# EAGLE board Term Project _ Micromouse (EAGLE 7.6.0)

Size 73.58 x 190.39 mm. Coordinates in mm from the lower left corner, seen from the top.
Outline: 0,0 56.82,0 56.82,53.33 0,53.33 0,0
Copper layers (1*16): Top 0.035mm / dielectric 1.5mm / Bottom 0.035mm
Design rules "default": minimum track width 10mil, minimum drill 24mil, track to track 8mil, track to pad 8mil, pad to pad 8mil, via to via 8mil, smd to smd 8mil, copper to edge 40mil, drill to drill 8mil, minimum pad ring 10mil, minimum via ring 8mil, stop-mask expansion 4mil, vias tented up to drill 0mil, thermal gap 10mil

## Footprints (pad centres in the part's own frame; a part is rotated, then mirrored left to right if it is on the bottom)
DC-POWER = drill 0.889 pad 2.54 octagon: + 0,2.54; - 0,-2.54
LED5MM = drill 0.813 octagon: A -1.27,0; K 1.27,0
2P-2.54-65/35MIL = drill 0.889 pad 1.651 square: 1 0,1.27 | drill 0.889 pad 1.651: 2 0,-1.27
PIEZO-22MM = drill 1 pad 2.54: P$1 -5,0; P$2 5,0
1X3P-2.54-2.54-11.6-3.0-BLACK-MALE = drill 0.889 pad 1.651 square: 1 0,2.54 | drill 0.889 pad 1.651: 2 0,0; 3 0,-2.54
0207/10 = drill 0.813 octagon: 1 -5.08,0; 2 5.08,0
TL1105 = drill 1 pad 1.676: 1 -2.25,3.25; 2 2.25,3.25; 3 -2.25,-3.25; 4 2.25,-3.25
ARDUINO_UNO = drill 1.016 pad 1.88: 0 63.5,50.8; 1 60.96,50.8; 2 58.42,50.8; 3 55.88,50.8; 3.3V 35.56,2.54; 4 53.34,50.8; 5 50.8,50.8; 5V 38.1,2.54; 6 48.26,50.8; 7 45.72,50.8; 8 41.656,50.8; 9 39.116,50.8; 10 36.576,50.8; 11 34.036,50.8; 12 31.496,50.8; 13 28.956,50.8; A0 50.8,2.54; A1 53.34,2.54; A2 55.88,2.54; A3 58.42,2.54; A4 60.96,2.54; A5 63.5,2.54; AREF 23.876,50.8; GND 26.416,50.8; GND. 43.18,2.54; GND.. 40.64,2.54; I/OREF 30.48,2.54; N/C 27.94,2.54; RESET 33.02,2.54; SCL 18.796,50.8; SDA 21.336,50.8; VIN 45.72,2.54 | hole 3.2: 66.04,7.62; 66.04,35.56; 15.24,50.8; 13.97,2.54
1X16P-2.54-2.54-11.6-3.0-BLACK-MALE = drill 0.889 pad 1.651 square: 1 0,19.05 | drill 0.889 pad 1.651: 2 0,16.51; 3 0,13.97; 4 0,11.43; 5 0,8.89; 6 0,6.35; 7 0,3.81; 8 0,1.27; 9 0,-1.27; 10 0,-3.81; 11 0,-6.35; 12 0,-8.89; 13 0,-11.43; 14 0,-13.97; 15 0,-16.51; 16 0,-19.05
DIL16 = drill 0.813 long: 1 -8.89,-3.81; 2 -6.35,-3.81; 3 -3.81,-3.81; 4 -1.27,-3.81; 5 1.27,-3.81; 6 3.81,-3.81; 7 6.35,-3.81; 8 8.89,-3.81; 9 8.89,3.81; 10 6.35,3.81; 11 3.81,3.81; 12 1.27,3.81; 13 -1.27,3.81; 14 -3.81,3.81; 15 -6.35,3.81; 16 -8.89,3.81

## Placement (x,y rotation side)
BAT2  [DC-POWER]  5,48.18 0 top
D1  [LED5MM]  5,149.78 0 top
D2  [LED5MM]  5,162.48 0 top
D3  [LED5MM]  5,175.18 0 top
M1  [2P-2.54-65/35MIL]  5,73.58 0 top
M2  [2P-2.54-65/35MIL]  5,86.28 0 top
PIEZO1  [PIEZO-22MM]  5,238.68 0 top  (outside the outline)
PING1  [1X3P-2.54-2.54-11.6-3.0-BLACK-MALE]  5,22.78 0 top
PING2  [1X3P-2.54-2.54-11.6-3.0-BLACK-MALE]  5,111.68 0 top
PING3  [1X3P-2.54-2.54-11.6-3.0-BLACK-MALE]  5,124.38 0 top
R1  1k‎Ω  [0207/10]  5,187.88 0 top
R2  1k‎Ω  [0207/10]  5,200.58 0 top  (outside the outline)
R3  1k‎Ω  [0207/10]  5,213.28 0 top  (outside the outline)
R4  1k‎Ω  [0207/10]  5,225.98 0 top  (outside the outline)
R5  1k‎Ω  [0207/10]  5,276.78 0 top  (outside the outline)
S1  [TL1105]  5,98.98 0 top
S2  [TL1105]  5,264.08 0 top  (outside the outline)
U1  [ARDUINO_UNO]  5,10.08 0 top
U2  [1X16P-2.54-2.54-11.6-3.0-BLACK-MALE]  5,251.38 0 top  (outside the outline)
U3  [1X16P-2.54-2.54-11.6-3.0-BLACK-MALE]  5,35.48 0 top
U4  [DIL16]  5,60.88 0 top
U6  [ARDUINO_UNO]  5,137.08 0 top

## Library data of the parts
BAT2 D1-D3 M1 M2 PIEZO1 PING1-PING3 R1-R5 S1 S2 U1-U4 U6 = AUTODESK_CIRCUITS_BREADBOARD

## Nets
N$1: U1.11 U4.15
N$2: M2.1 U4.14
N$3: S1.2
N$4: S1.4 U1.2
N$5: S1.3
N$6: U1.8 U4.1
N$7: U1.5 U4.2
N$8: M1.1 U4.3
N$9: M1.2 U4.6
N$10: U1.9 U4.7
N$11: U1.12 U4.9
N$12: U1.10 U4.10
N$13: M2.2 U4.11
N$14: BAT2.- PIEZO1.P$2 PING1.1 PING2.1 PING3.1 S1.1 U1.GND U3.1 U3.3 U3.5 U3.16 U4.5 U4.12
N$15: U4.13
N$16: PING3.3 U1.3
N$17: PING2.3 U1.4
N$18: D1.A R3.1
N$19: D2.A R2.1
N$20: D1.K D2.K D3.K U6.GND
N$21: D3.A R1.1
N$22: R1.2 U6.11
N$23: R2.2 U6.12
N$24: R3.2 U6.13
N$25: U1.A0 U3.4
N$26: U1.A1 U3.6
N$27: U1.A2 U3.11
N$28: U1.A3 U3.12
N$29: U1.A4 U3.13
N$30: U1.A5 U3.14
N$31: PING1.2 PING2.2 PING3.2 R4.2 U1.5V U3.2
N$32: U3.9
N$33: U3.10
N$34: R4.1 U3.15
N$35: U3.7
N$36: U3.8
N$37: PING1.3 U1.7
N$38: BAT2.+ U4.8 U4.16
N$39: U4.4
N$40: PIEZO1.P$1 U1.6
N$41: U1.GND.. U6.GND..
N$42: U1.1 U6.0
N$43: U1.0 U6.1
N$44: U2.4 U6.10
N$45: U2.6 U6.9
N$46: U2.7
N$47: U2.8
N$48: U2.9
N$49: U2.10
N$50: U2.11 U6.8
N$51: U2.12 U6.7
N$52: U2.13 U6.6
N$53: U2.14 U6.5
N$54: R5.1 U2.15
N$55: S2.1 U2.1 U2.3 U2.5 U2.16 U6.GND.
N$56: S2.4 U6.2
N$57: S2.2
N$58: S2.3
N$59: R5.2 U2.2 U6.5V

## Tracks (layer width: path | path; a pad name or v marks a point on that pad's centre or on a via)
N$1  (1 unrouted)
N$2  (1 unrouted)
N$4  (1 unrouted)
N$6  (1 unrouted)
N$7  (1 unrouted)
N$8  (1 unrouted)
N$9  (1 unrouted)
N$10  (1 unrouted)
N$11  (1 unrouted)
N$12  (1 unrouted)
N$13  (1 unrouted)
N$14  (12 unrouted)
N$16  (1 unrouted)
N$17  (1 unrouted)
N$18  (1 unrouted)
N$19  (1 unrouted)
N$20  (3 unrouted)
N$21  (1 unrouted)
N$22  (1 unrouted)
N$23  (1 unrouted)
N$24  (1 unrouted)
N$25  (1 unrouted)
N$26  (1 unrouted)
N$27  (1 unrouted)
N$28  (1 unrouted)
N$29  (1 unrouted)
N$30  (1 unrouted)
N$31  (5 unrouted)
N$34  (1 unrouted)
N$37  (1 unrouted)
N$38  (2 unrouted)
N$40  (1 unrouted)
N$41  (1 unrouted)
N$42  (1 unrouted)
N$43  (1 unrouted)
N$44  (1 unrouted)
N$45  (1 unrouted)
N$50  (1 unrouted)
N$51  (1 unrouted)
N$52  (1 unrouted)
N$53  (1 unrouted)
N$54  (1 unrouted)
N$55  (5 unrouted)
N$56  (1 unrouted)
N$59  (2 unrouted)